# EAGLE board design (EAGLE 6.5.0)
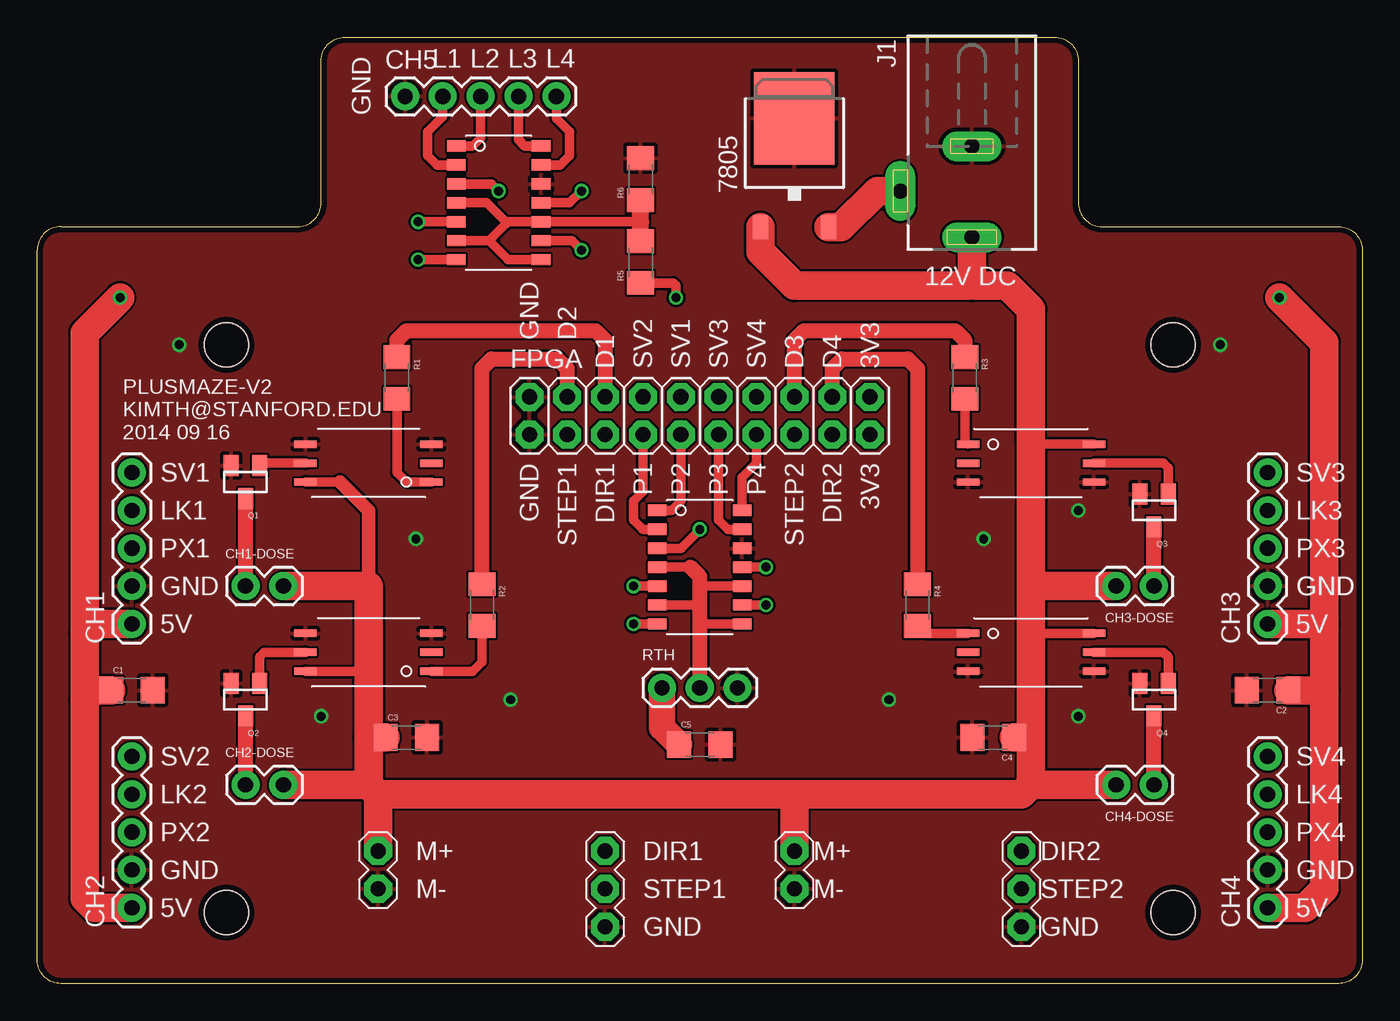
[diagram p0: board, top side]
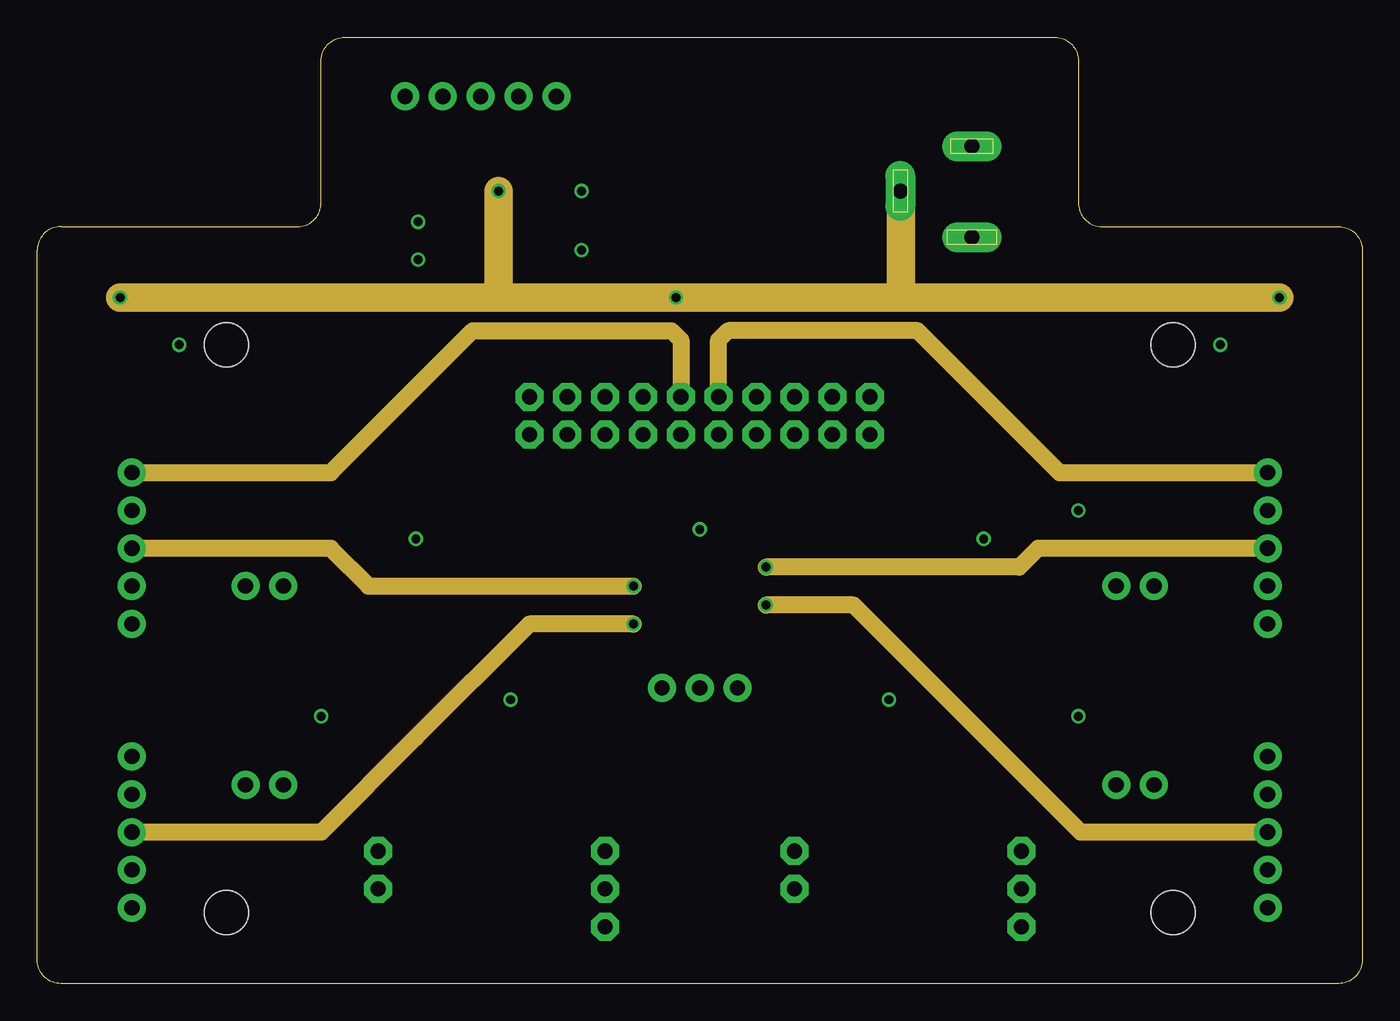
[diagram p1: board, inner layer Route2]
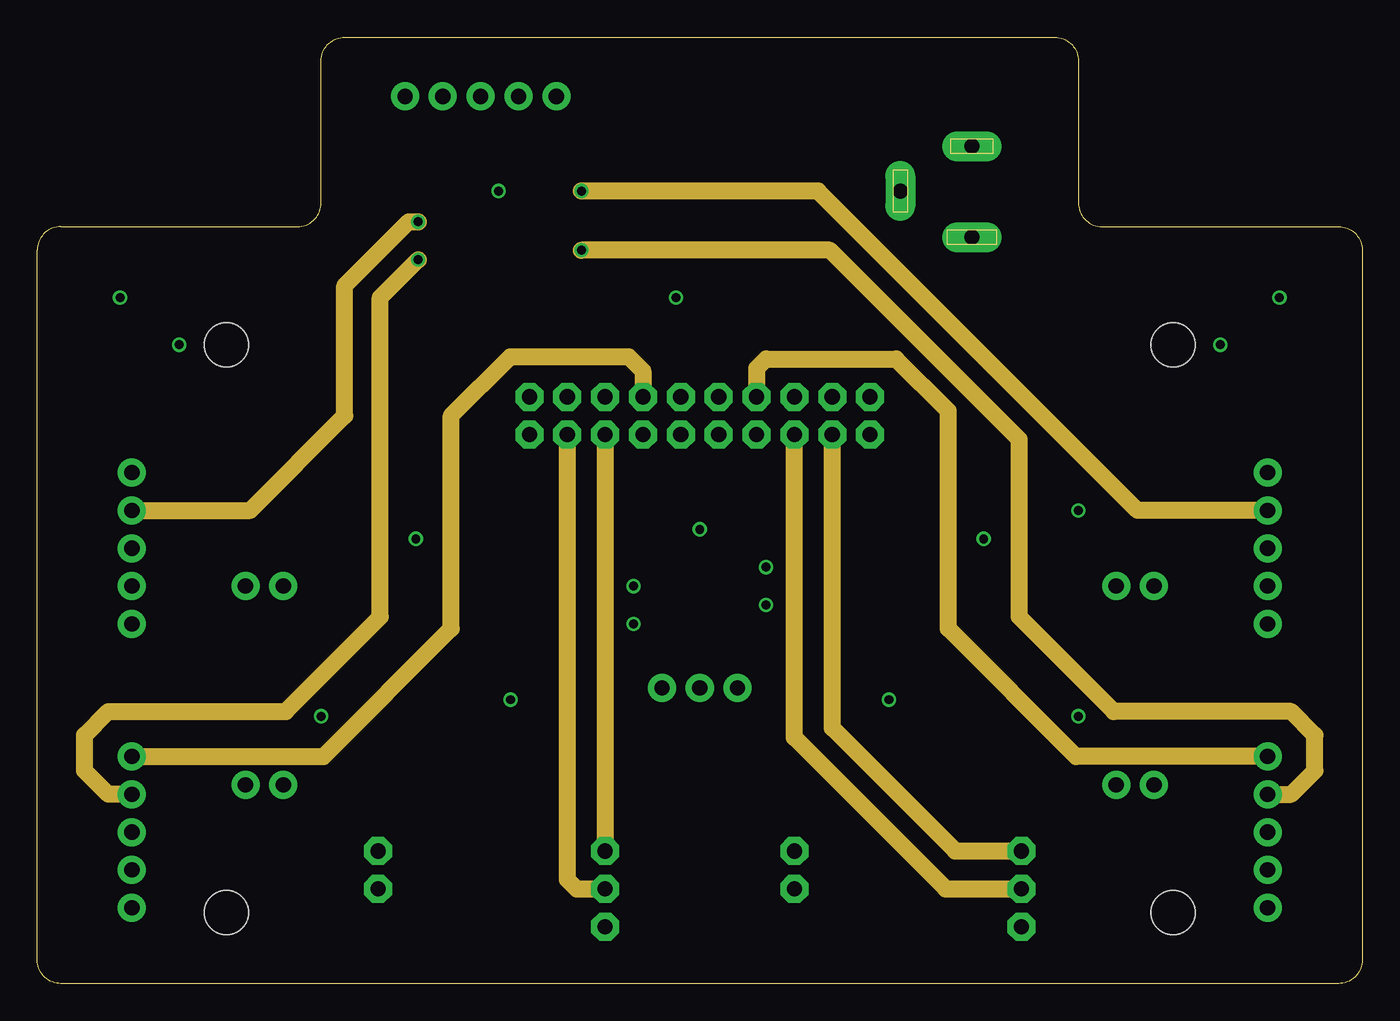
[diagram p2: board, inner layer Route3]
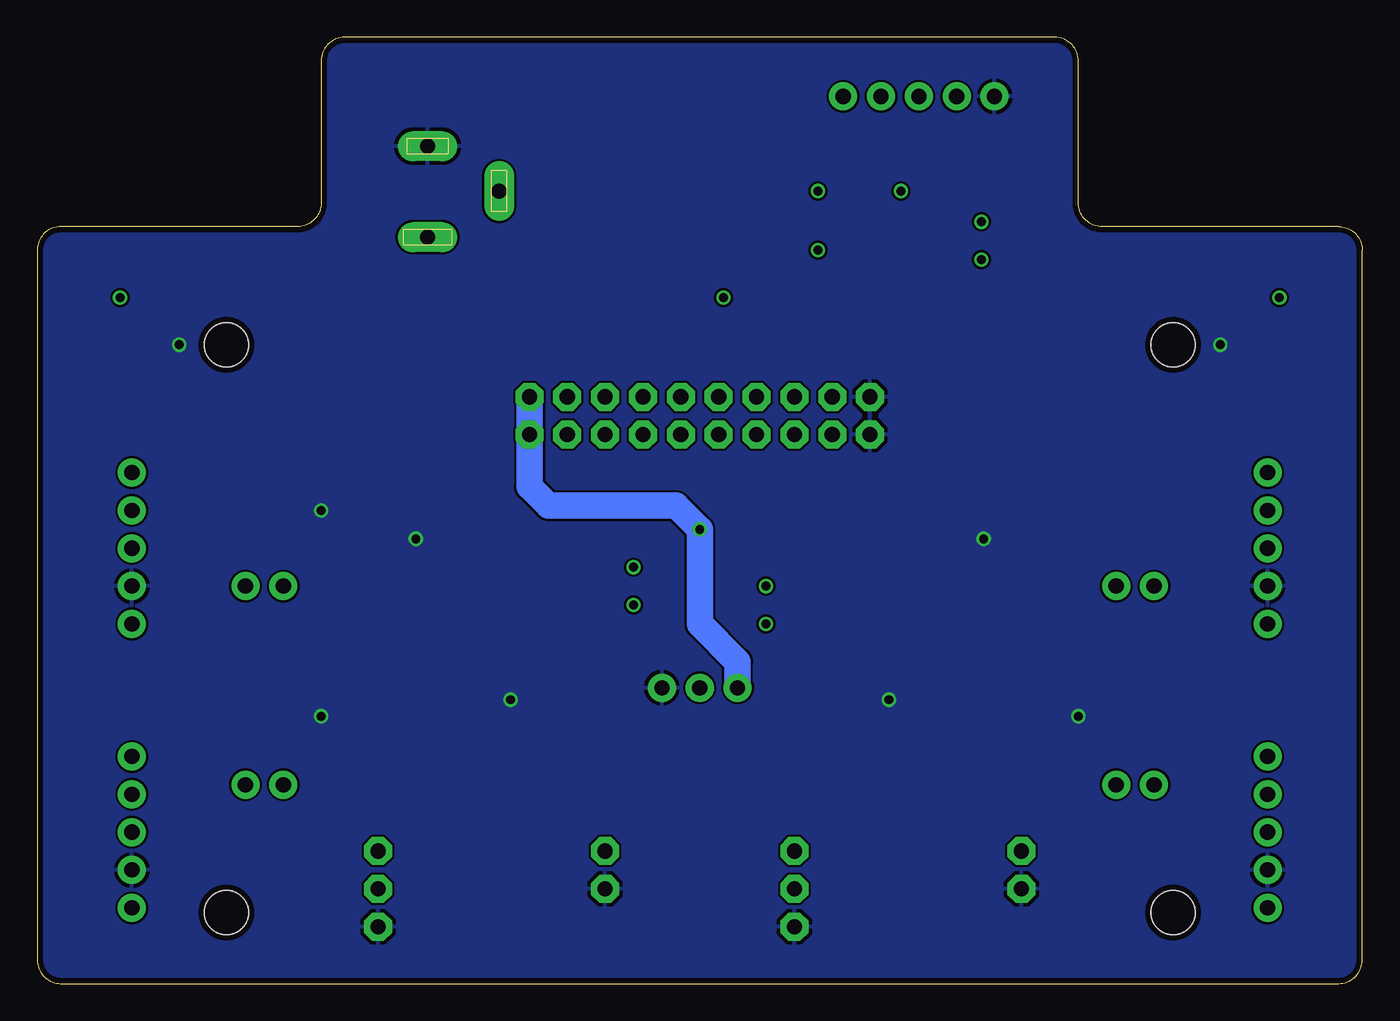
[diagram p3: board, bottom side, seen from below]

Size 88.9 x 63.5 mm. Coordinates in mm from the lower left corner, seen from the top.
Outline: 1.59,50.8 arc90 0,49.21 0,1.59 arc90 1.59,0 87.31,0 arc90 88.9,1.59 88.9,49.21 arc90 87.31,50.8 71.44,50.8 arc-90 69.85,52.39 69.85,61.91 arc90 68.26,63.5 20.64,63.5 arc90 19.05,61.91 19.05,52.39 arc-90 17.46,50.8 1.59,50.8
Copper layers (1*2*3*16): Top 0.035559375mm / dielectric 0.17018125mm / Route2 0.01778125mm / dielectric 47mil / Route3 0.01778125mm / dielectric 0.17018125mm / Bottom 0.035559375mm
Design rules "LaenPCBOrder *": minimum track width 6mil, minimum drill 13mil, track to track 6mil, track to pad 6mil, pad to pad 6mil, via to via 6mil, smd to smd 6mil, copper to edge 15mil, drill to drill 6mil, minimum pad ring 7mil, minimum via ring 7mil, stop-mask expansion 3mil, vias tented up to drill 0mil, thermal gap 10mil
Holes 2.95 mm at 12.7,42.86 76.2,42.86 76.2,4.76 12.7,4.76

## Footprints (pad centres in the part's own frame; a part is rotated, then mirrored left to right if it is on the bottom)
TO252 = smd 1 x 1.6: 1 -2.28,-4.8; 2 2.28,-4.8 | smd 5.4 x 6.2: 3 0,2.5
1206 = smd 1.6 x 1.8: 1 -1.4,0; 2 1.4,0
1X05 = drill 1.016 pad 1.88: 1 0,0; 2 2.54,0; 3 5.08,0; 4 7.62,0; 5 10.16,0
1X02 = drill 1.016 pad 1.88: 1 0,0; 2 2.54,0
2X10 = drill 1.016 pad 1.88 octagon: 1 -11.43,-1.27; 2 -11.43,1.27; 3 -8.89,-1.27; 4 -8.89,1.27; 5 -6.35,-1.27; 6 -6.35,1.27; 7 -3.81,-1.27; 8 -3.81,1.27; 9 -1.27,-1.27; 10 -1.27,1.27; 11 1.27,-1.27; 12 1.27,1.27; 13 3.81,-1.27; 14 3.81,1.27; 15 6.35,-1.27; 16 6.35,1.27; 17 8.89,-1.27; 18 8.89,1.27; 19 11.43,-1.27; 20 11.43,1.27
DCJ0303 = drill 1 pad 2 long: 1 0,3.1; 2 4.8,0; 3 0,-3
SOT23 = smd 1 x 1.4: 1 -0.95,-1.1; 2 0.95,-1.1; 3 0,1.1
1X03 = drill 1.016 pad 1.88: 1 0,0; 2 2.54,0; 3 5.08,0
TLP701 = smd 0.5 x 1.5: P$1 -1.27,-4.225; P$2 0,-4.225; P$3 1.27,-4.225; P$4 1.27,4.225; P$5 0,4.225; P$6 -1.27,4.225
BA10339-SOP14 = smd 0.76 x 1.25: P$1 -3.81,-2.85; P$2 -2.54,-2.85; P$3 -1.27,-2.85; P$4 0,-2.85; P$5 1.27,-2.85; P$6 2.54,-2.85; P$7 3.81,-2.85; P$8 3.81,2.85; P$9 2.54,2.85; P$10 1.27,2.85; P$11 0,2.85; P$12 -1.27,2.85; P$13 -2.54,2.85; P$14 -3.81,2.85
EASYDRIVER = drill 1.016 pad 1.88 octagon: P$1 -7.62,2.54; P$2 -7.62,0; P$3 7.62,2.54; P$4 7.62,0; P$5 7.62,-2.54

## Placement (x,y rotation side)
7805  7805DT  [TO252]  50.8,55.56 0 top
C1  [1206]  6.35,19.68 0 top
C2  [1206]  82.55,19.68 180 top
C3  [1206]  24.77,16.51 0 top
C4  [1206]  64.14,16.51 180 top
C5  [1206]  44.45,16.03 0 top
CH1  [1X05]  6.35,24.13 90 top
CH1-DOSE  M02PTH  [1X02]  13.97,26.67 0 top
CH2  [1X05]  6.35,5.08 90 top
CH2-DOSE  M02PTH  [1X02]  13.97,13.34 0 top
CH3  [1X05]  82.55,24.13 90 top
CH3-DOSE  M02PTH  [1X02]  74.93,26.67 180 top
CH4  [1X05]  82.55,5.08 90 top
CH4-DOSE  M02PTH  [1X02]  74.93,13.34 180 top
CH5  [1X05]  24.67,59.53 0 top
FPGA  [2X10]  44.45,38.1 0 top
J1  [DCJ0303]  62.71,53.18 180 top
Q1  MOSFET-NCHANNELBSS123LT1G  [SOT23]  13.97,33.66 180 top
Q2  MOSFET-NCHANNELBSS123LT1G  [SOT23]  13.97,19.05 180 top
Q3  MOSFET-NCHANNELBSS123LT1G  [SOT23]  74.93,31.75 180 top
Q4  MOSFET-NCHANNELBSS123LT1G  [SOT23]  74.93,19.05 180 top
R1  [1206]  24.13,40.64 270 top
R2  [1206]  29.84,25.4 270 top
R3  [1206]  62.23,40.64 270 top
R4  [1206]  59.05,25.4 270 top
R5  [1206]  40.48,48.42 90 top
R6  [1206]  40.48,53.98 90 top
RTH  [1X03]  41.91,19.84 0 top
U$1  TLP701  [TLP701]  22.23,34.92 90 top
U$2  TLP701  [TLP701]  22.23,22.23 90 top
U$3  TLP701  [TLP701]  66.67,34.92 270 top
U$4  TLP701  [TLP701]  66.67,22.23 270 top
U$5  BA10339  [BA10339-SOP14]  44.45,27.94 270 top
U$6  EASYDRIVER  [EASYDRIVER]  30.48,6.35 0 top
U$7  EASYDRIVER  [EASYDRIVER]  58.42,6.35 0 top
U$8  BA10339  [BA10339-SOP14]  30.96,52.39 270 top

## Library data of the parts
7805 = linear
C1-C5 = SparkFun-Passives
CH1 CH1-DOSE CH2 CH2-DOSE CH3 CH3-DOSE CH4 CH4-DOSE CH5 FPGA RTH = SparkFun-Connectors
J1 = con-jack; OC_FARNELL: unknown; OC_NEWARK: unknown
Q1-Q4 = SparkFun-DiscreteSemi; PROD_ID: TRANS-08345
R1-R6 = SparkFun-Resistors
U$1-U$8 = kimth

## Nets
3.3V: C5.1 FPGA.19 FPGA.20 RTH.1 U$5.P$3
5V: 7805.2 C1.1 C2.1 CH1.1 CH2.1 CH3.1 CH4.1 J1.2 R5.1 U$8.P$3
12V: 7805.1 C3.1 C4.1 CH1-DOSE.2 CH2-DOSE.2 CH3-DOSE.2 CH4-DOSE.2 J1.1 U$1.P$6 U$2.P$6 U$3.P$6 U$4.P$6 U$6.P$1 U$7.P$1
D1: FPGA.6 R1.1
D1_DRAIN: CH1-DOSE.1 Q1.3
D2: FPGA.4 R2.1
D2_DRAIN: CH2-DOSE.1 Q2.3
D3: FPGA.16 R3.1
D3_DRAIN: CH3-DOSE.1 Q3.3
D4: FPGA.18 R4.1
D4_DRAIN: CH4-DOSE.1 Q4.3
DIR1: FPGA.5 U$6.P$3
DIR2: FPGA.17 U$7.P$3
GND: 7805.3 C1.2 C2.2 C3.2 C4.2 C5.2 CH1.2 CH2.2 CH3.2 CH4.2 CH5.1 FPGA.1 FPGA.2 J1.3 Q1.2 Q2.2 Q3.2 Q4.2 R6.2 RTH.3 U$1.P$3 U$1.P$4 U$2.P$3 U$2.P$4 U$3.P$3 U$3.P$4 U$4.P$3 U$4.P$4 U$5.P$12 U$6.P$2 U$6.P$5 U$7.P$2 U$7.P$5 U$8.P$12
L1: CH5.2 U$8.P$2
L2: CH5.3 U$8.P$1
L3: CH5.4 U$8.P$14
L4: CH5.5 U$8.P$13
LICK1: CH1.4 U$8.P$5
LICK2: CH2.4 U$8.P$7
LICK3: CH3.4 U$8.P$11
LICK4: CH4.4 U$8.P$9
N$1: Q1.1 U$1.P$5
N$2: Q2.1 U$2.P$5
N$3: Q3.1 U$3.P$5
N$5: Q4.1 U$4.P$5
N$6: R1.2 U$1.P$1
N$7: R2.2 U$2.P$1
N$8: R3.2 U$3.P$1
N$9: R4.2 U$4.P$1
P1: FPGA.7 U$5.P$2
P2: FPGA.9 U$5.P$1
P3: FPGA.11 U$5.P$13
P4: FPGA.13 U$5.P$14
PROX1: CH1.3 U$5.P$5
PROX2: CH2.3 U$5.P$7
PROX3: CH3.3 U$5.P$11
PROX4: CH4.3 U$5.P$9
SERVO1: CH1.5 FPGA.10
SERVO2: CH2.5 FPGA.8
SERVO3: CH3.5 FPGA.12
SERVO4: CH4.5 FPGA.14
STEP1: FPGA.3 U$6.P$4
STEP2: FPGA.15 U$7.P$4
VTH: RTH.2 U$5.P$4 U$5.P$6 U$5.P$8 U$5.P$10
VTH2: R5.2 R6.1 U$8.P$4 U$8.P$6 U$8.P$8 U$8.P$10

## Tracks (layer width: path | path; a pad name or v marks a point on that pad's centre or on a via)
3.3V  (via drill 0.6)
  Top 0.635: U$5.P$3 43.18,29.21 v44.45,30.48
  Top 1.778: C5.1 41.91,17.17 RTH.1
  Bottom 1.778: FPGA.20 FPGA.19 55.88,33.34 54.61,32.07 46.04,32.07 v44.45,30.48 44.45,24.13 41.91,21.59 RTH.1
5V  (via drill 0.6)
  Top 0.635: U$8.P$3 30.48,53.66 v30.96,53.18 | R5.1 42.67,47.02 42.86,46.83 v42.86,46.04
  Top 1.905: 3.17,23.5 3.17,43.66 v5.56,46.04 | CH4.1 85.09,5.08 86.36,6.35 86.36,19.68 | 86.36,19.68 86.36,24.13 | 86.36,24.13 86.36,43.02 v83.34,46.04 | CH3.1 86.36,24.13 | CH1.1 3.81,24.13 3.17,23.5 | 3.17,23.5 3.17,19.05 | 3.17,19.05 3.17,5.71 3.81,5.08 CH2.1 | C1.1 3.81,19.68 3.17,19.05 | C2.1 86.36,19.68 | 7805.2 53.94,50.76 56.36,53.18 J1.2
  Route2 1.905: v5.56,46.04 30.96,46.04 | v83.34,46.04 57.94,46.04 | 57.94,46.04 v42.86,46.04 30.96,46.04 | v30.96,53.18 30.96,46.04 | J1.2 57.94,53.14 57.94,46.04
12V
  Top 0.635: U$1.P$6 20.32,33.66 | U$2.P$6 21.59,20.95 22.23,20.32 | U$4.P$6 66.67,23.5 | U$3.P$6 66.67,36.2
  Top 0.889: 20.32,33.66 22.23,31.75 22.23,26.67
  Top 1.905: 66.67,26.67 66.67,36.2 66.67,45.24 65.09,46.83 62.71,46.83 | 66.67,26.67 66.67,23.5 66.67,16.51 | 66.67,16.51 66.67,13.34 | 66.67,13.34 66.04,12.7 50.8,12.7 | 22.86,12.7 22.23,13.34 | 22.23,16.51 22.23,20.32 22.23,26.67 CH1-DOSE.2 | 22.23,16.51 22.23,13.34 | CH2-DOSE.2 22.23,13.34 | U$6.P$1 22.86,12.7 | CH4-DOSE.2 66.67,13.34 | 50.8,12.7 22.86,12.7 | U$7.P$1 50.8,12.7 | C3.1 22.23,16.51 | C4.1 66.67,16.51 | CH3-DOSE.2 66.67,26.67 | J1.1 62.71,46.83 | 62.71,46.83 50.8,46.83 48.52,49.11 7805.1
D1
  Top 1.016: FPGA.6 38.1,43.18 37.47,43.81 24.77,43.81 24.13,43.18 R1.1
D1_DRAIN
  Top 1.016: CH1-DOSE.1 Q1.3
D2
  Top 1.016: R2.1 29.84,41.27 30.48,41.91 34.92,41.91 35.56,41.27 FPGA.4
D2_DRAIN
  Top 1.016: CH2-DOSE.1 Q2.3
D3
  Top 1.016: FPGA.16 50.8,43.18 51.44,43.81 61.59,43.81 62.23,43.18 R3.1
D3_DRAIN
  Top 1.016: CH3-DOSE.1 Q3.3
D4
  Top 1.016: FPGA.18 53.34,41.27 53.98,41.91 58.42,41.91 59.05,41.27 R4.1
D4_DRAIN
  Top 1.016: CH4-DOSE.1 Q4.3
DIR1
  Route3 1.143: FPGA.5 U$6.P$3
DIR2
  Route3 1.143: U$7.P$3 61.59,8.89 53.34,17.14 FPGA.17
GND  (via drill 0.6)
  other vias: 9.53,42.86 31.75,19.05 57.15,19.05 19.05,17.94 69.85,17.94 25.4,29.84 63.5,29.84 69.85,31.75 79.38,42.86
  pour Top: 0,50.8 19.05,50.8 19.05,63.5 69.85,63.5 69.85,50.8 88.9,50.8 88.9,0 0,0
  pour Bottom: 0,50.8 19.05,50.8 19.05,63.5 69.85,63.5 69.85,50.8 88.9,50.8 88.9,0 0,0
L1
  Top 0.635: U$8.P$2 26.83,54.93 26.19,55.56 26.19,57.15 27.21,58.17 CH5.2
L2
  Top 0.635: U$8.P$1 29.21,56.2 29.75,56.74 CH5.3
L3
  Top 0.635: U$8.P$14 32.7,56.2 32.29,56.61 CH5.4
L4
  Top 0.635: U$8.P$13 35.08,54.93 35.72,55.56 35.72,57.15 34.83,58.04 CH5.5
LICK1  (via drill 0.6)
  Top 0.635: v25.56,51.12 U$8.P$5
  Route3 1.143: CH1.4 14.29,31.75 20.64,38.1 20.64,46.83 24.92,51.12 v25.56,51.12
LICK2  (via drill 0.6)
  Top 0.635: v25.56,48.58 U$8.P$7
  Route3 1.143: CH2.4 4.76,12.7 3.17,14.29 3.17,16.67 4.76,18.26 16.67,18.26 23.02,24.61 23.02,46.04 v25.56,48.58
LICK3  (via drill 0.6)
  Top 0.635: v36.51,53.18 35.72,52.39 U$8.P$11
  Route3 1.143: CH3.4 73.82,31.75 52.39,53.18 v36.51,53.18
LICK4  (via drill 0.6)
  Top 0.635: v36.51,49.21 35.88,49.85 U$8.P$9
  Route3 1.143: CH4.4 84.14,12.7 85.72,14.29 85.72,16.67 84.14,18.26 72.23,18.26 65.88,24.61 65.88,36.51 53.18,49.21 v36.51,49.21
N$1
  Top 0.635: U$1.P$5 15.09,34.92 Q1.1
N$2
  Top 0.635: Q2.1 14.92,21.91 15.24,22.23 U$2.P$5
N$3
  Top 0.635: Q3.1 75.88,34.61 75.56,34.92 U$3.P$5
N$5
  Top 0.635: Q4.1 75.88,21.91 75.56,22.23 U$4.P$5
N$6
  Top 0.635: R1.2 24.13,34.29 24.77,33.66 U$1.P$1
N$7
  Top 0.635: U$2.P$1 29.21,20.95 29.84,21.59 R2.2
N$8
  Top 0.635: R3.2 62.23,36.41 U$3.P$1
N$9
  Top 0.635: R4.2 59.56,23.5 U$4.P$1
P1
  Top 0.635: FPGA.7 40.64,33.02 40.01,32.38 40.01,31.11 40.64,30.48 U$5.P$2
P2
  Top 0.635: U$5.P$1 42.55,31.75 43.18,32.38 FPGA.9
P3
  Top 0.635: U$5.P$13 46.35,30.48 45.72,31.11 FPGA.11
P4
  Top 0.635: U$5.P$14 47.3,33.97 48.26,34.92 FPGA.13
PROX1  (via drill 0.6)
  Top 0.635: v40.01,26.67 U$5.P$5
  Route2 1.143: v40.01,26.67 22.23,26.67 19.68,29.21 CH1.3
PROX2  (via drill 0.6)
  Top 0.635: v40.01,24.13 U$5.P$7
  Route2 1.143: CH2.3 19.05,10.16 25.4,16.51 33.02,24.13 v40.01,24.13
PROX3  (via drill 0.6)
  Top 0.635: v48.9,27.94 U$5.P$11
  Route2 1.143: CH3.3 67.15,29.21 65.88,27.94 v48.9,27.94
PROX4  (via drill 0.6)
  Top 0.635: U$5.P$9 v48.9,25.4
  Route2 1.143: CH4.3 70.01,10.16 54.77,25.4 v48.9,25.4
SERVO1
  Route2 1.143: FPGA.10 43.18,43.18 42.55,43.81 29.21,43.81 19.68,34.29 CH1.5
SERVO2
  Route3 1.143: CH2.5 19.21,15.24 27.78,23.81 27.78,38.1 31.75,42.07 39.69,42.07 40.64,41.12 FPGA.8
SERVO3
  Route2 1.143: FPGA.12 45.72,43.18 46.35,43.81 59.05,43.81 68.58,34.29 CH3.5
SERVO4
  Route3 1.143: FPGA.14 48.26,41.27 48.9,41.91 57.63,41.91 61.12,38.42 61.12,23.81 69.69,15.24 CH4.5
STEP1
  Route3 1.143: FPGA.3 35.56,6.99 36.2,6.35 U$6.P$4
STEP2
  Route3 1.143: U$7.P$4 60.96,6.35 50.8,16.51 FPGA.15
VTH
  Top 0.635: 43.81,27.94 U$5.P$4 | U$5.P$10 44.45,26.67 | U$5.P$6 44.45,25.4 | U$5.P$8 44.45,24.13
  Top 1.016: RTH.2 44.45,24.13 44.45,25.4 44.45,26.67 44.45,27.3 43.81,27.94
VTH2
  Top 0.635: U$8.P$4 30.16,52.39 31.43,51.12 | 31.43,51.12 U$8.P$10 40.48,51.12 | U$8.P$6 30.32,49.85 | 30.32,49.85 31.59,48.58 U$8.P$8 | 30.32,49.85 31.43,50.96 31.43,51.12
  Top 1.143: R5.2 40.48,51.12 R6.1

## Text on the board
tPlace: L1 | L2 | L3 | L4 | GND | 12V DC | GND | D2 | D1 | SV2 | SV1 | SV3 | SV4 | D3 | D4 | 3V3 | GND | STEP1 | DIR1 | P1 | P2 | P3 | P4 | STEP2 | DIR2 | 3V3 | SV1 | SV3 | LK1 | LK3 | PX1 | PX3 | GND | GND | GND | 5V | 5V | SV2 | SV4 | LK2 | LK4 | PX2 | PX4 | M+ | DIR1 | M+ | DIR2 | GND | GND | M- | STEP1 | M- | STEP2 | 5V | 5V | GND | GND
tNames: PLUSMAZE-V2 / KIMTH@STANFORD.EDU / 2014 09 16